# Altium PCB HARDWARE TASK_PCB.PcbDoc
Units mil, origin at the board's own origin, x right, y up, seen from the top; angles counter-clockwise.
Board outline 8165 x 5000 mil, 2 copper layers (Top Layer, Bottom Layer); 43 components, 51 nets, 262 pads, 62 vias.
Unrouted connection lines stored in the file: 4.
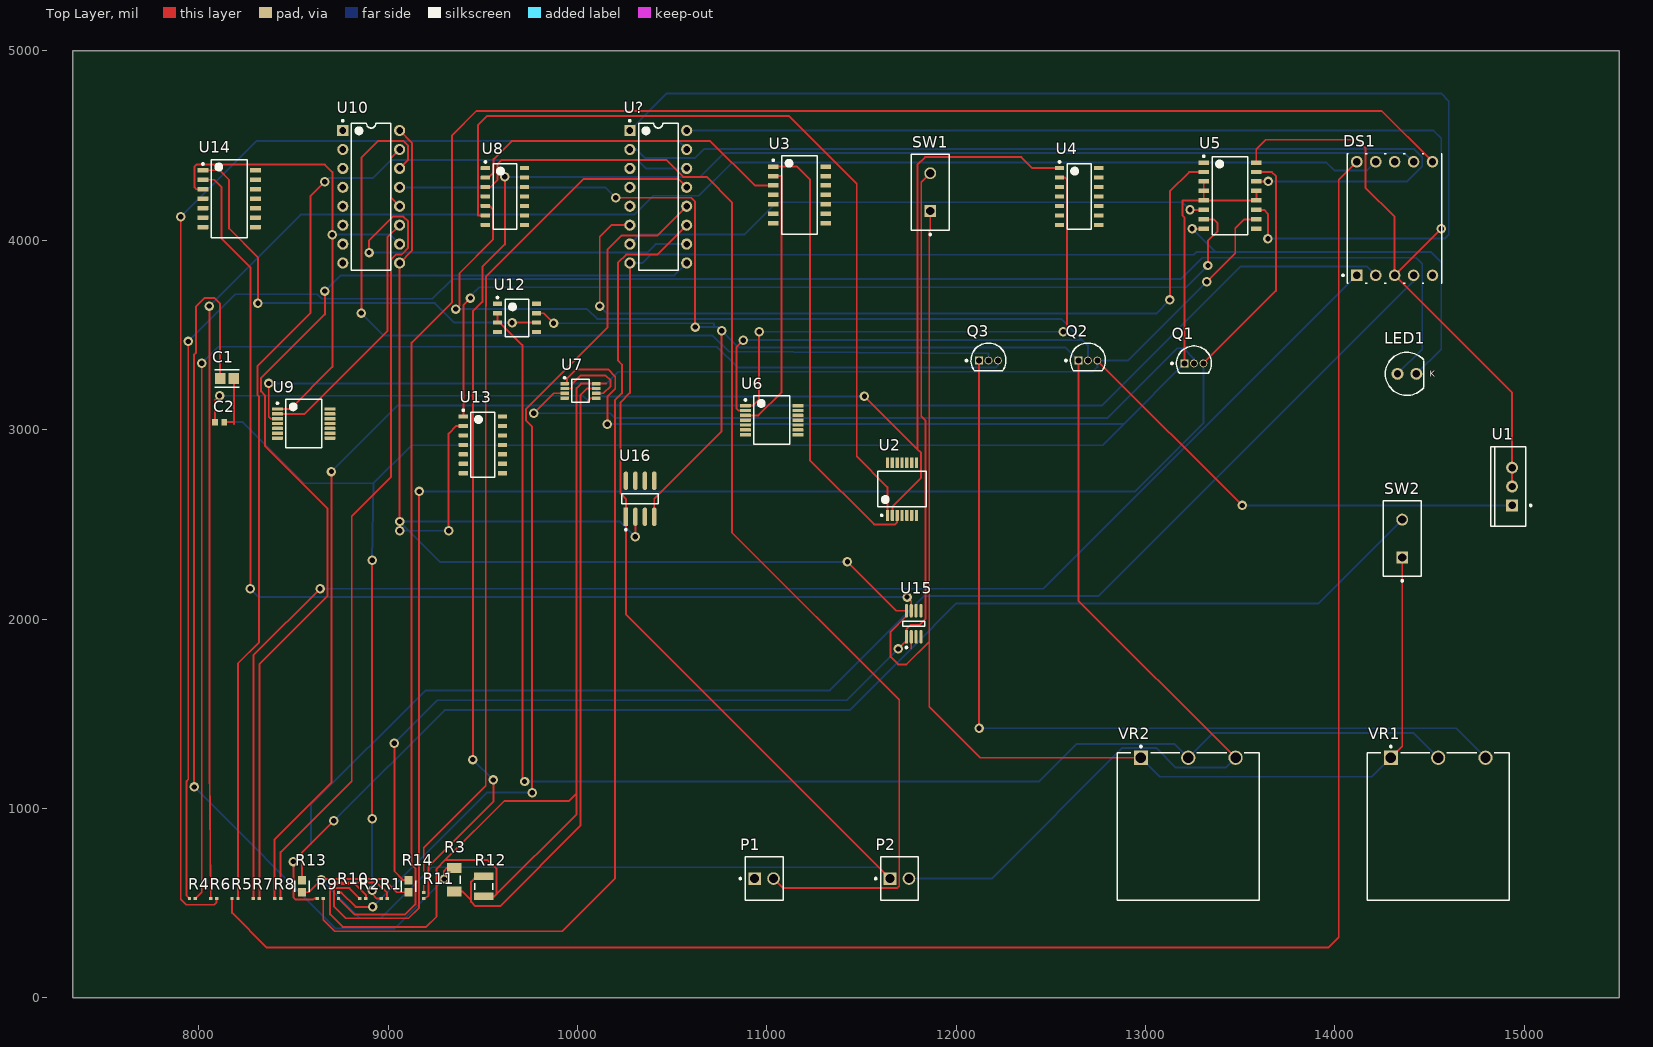
[diagram p0: Top Layer view]
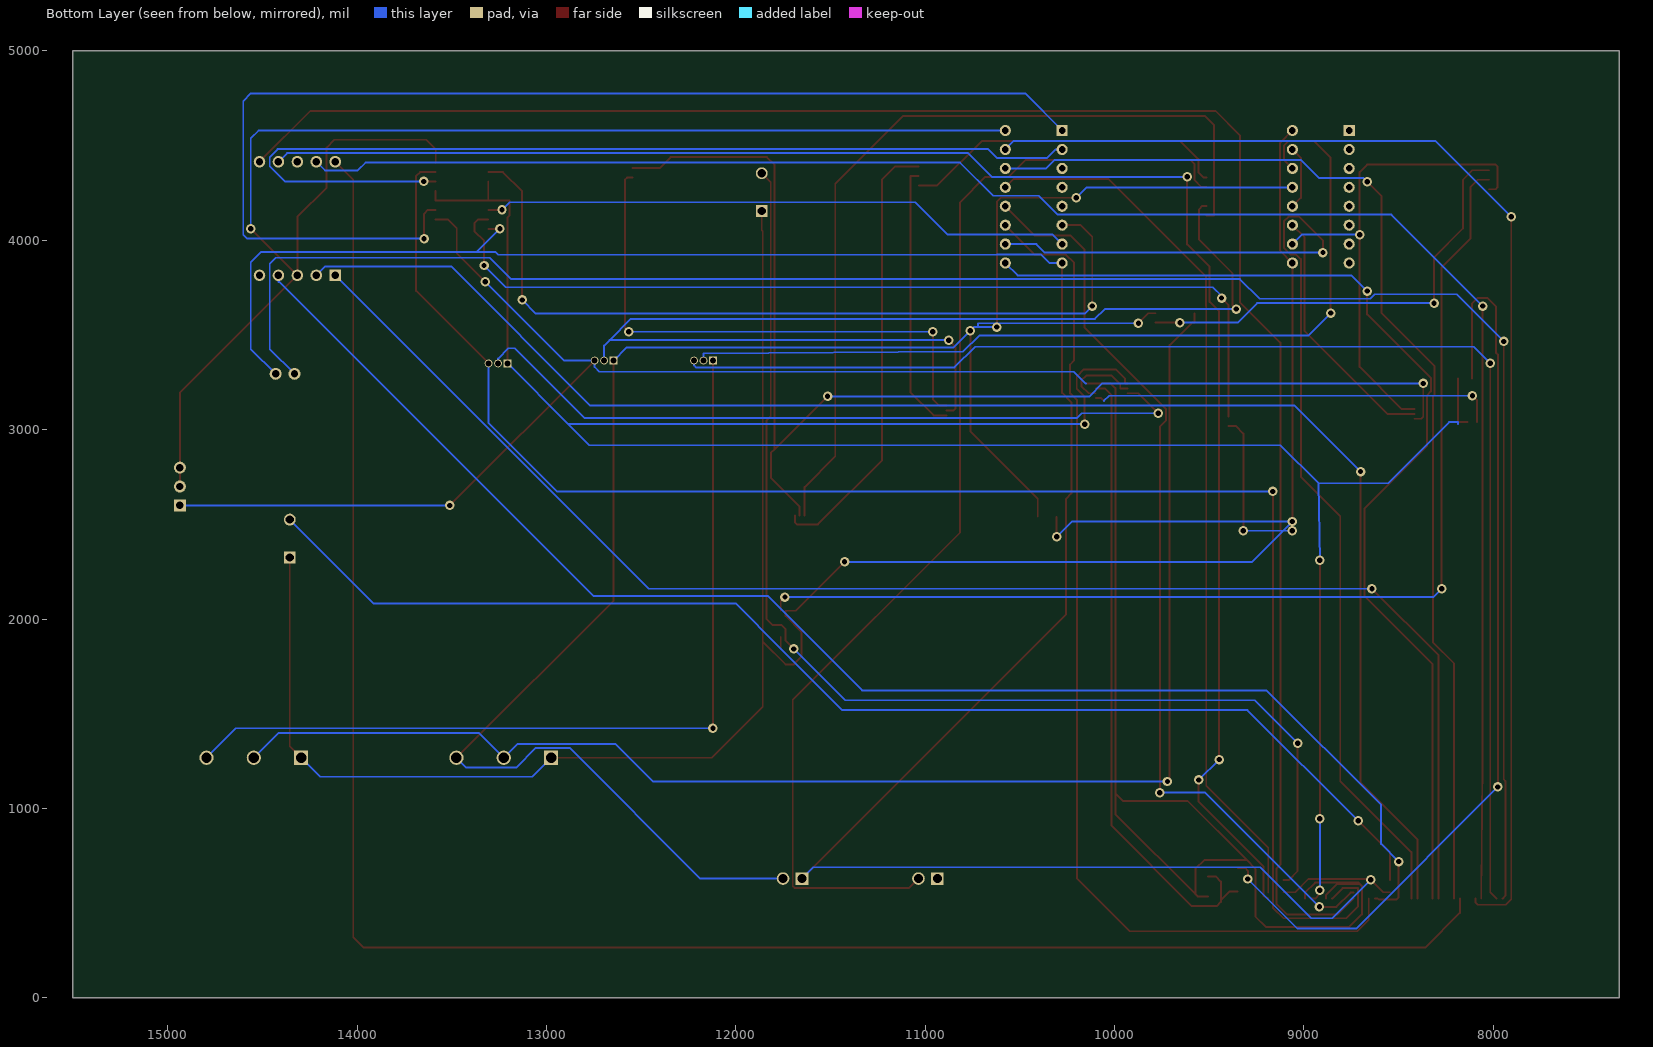
[diagram p1: Bottom Layer view, seen from below]

## Layer stack, top to bottom
Top Solder: solder mask 0.4, Solder Resist, Dk 3.5
Top Layer: signal copper 1.4
Dielectric 1: dielectric 12.6, FR-4, Dk 4.8
Bottom Layer: signal copper 1.4
Bottom Solder: solder mask 0.4, Solder Resist, Dk 3.5

## Board outline
7335,0 15500,0 15500,5000 7335,5000

## Design rules (kind name [scope] priority, off if disabled: settings)
Clearance [All] p1: gap=10 ignorepadtopadclearanceinfootprint=FALSE except(0: Arc-Hole Track-Hole SMDPad-Hole THPad-Hole Via-Hole Fill-Hole Poly-Hole Region-Hole Text-Hole)
PolygonConnect [All] p1: connectstyle=Relief reliefconductorwidth=10 reliefentries=4 polygonreliefangle="90 Angle" airgapwidth=10
RoutingVias [All] p1: holewidth=28 width=50 viastyle="Through Hole" minholewidth=28 minwidth=50 maxholewidth=28 maxwidth=50
SolderMaskExpansion [All] p1: expansion=4 istentingtop=FALSE
Width [All] p1: maxlimit=10 minlimit=10 preferedwidth=10
30 further rules are at their usual default settings.

## Components (designator, comment, footprint, x,y, rotation, side; value= is the part's Value field where it differs from the comment)
C1 "GRM21BR61E106KA73L" "CAP 10UF" 8148.53,3270 r0 top
C2 "GRM188R71H103KA01D" "CAP 10NF" 8109.61,3040 r0 top
DS1 "LSHD-5601" 7SEG 14315,4115 r0 top
LED1 "151051BS04000" "BLUE LED" 14380,3295 r0 top
P1 "22-27-2021" PIN 10985,629.21 r0 top
P2 "22-27-2021" PIN 11700,629.21 r0 top
Q1 "BC548B" "NPN TRANS" 13255,3350 r0 top
Q2 "BC548B" "NPN TRANS" 12695,3365 r0 top
Q3 "BC548B" "NPN TRANS" 12170,3365 r0 top
R1 "CRCW0402200RJNED" "200 OHM RES" 8978.37,523.96 r0 top
R2 "CRCW0402200RJNED" "200 OHM RES" 8865.86,523.96 r0 top
R3 "RN732BTTD6002B25" "60KOHM RES" 9348.45,623.43 r90 top
R4 "CRCW0402200RJNED" "200 OHM RES" 7965.75,523.96 r0 top
R5 "CRCW0402200RJNED" "200 OHM RES" 8190.78,523.96 r0 top
R6 "CRCW0402200RJNED" "200 OHM RES" 8078.26,523.96 r0 top
R7 "CRCW0402200RJNED" "200 OHM RES" 8303.29,523.96 r0 top
R8 "CRCW0402200RJNED" "200 OHM RES" 8415.8,523.96 r0 top
R9 "CRCW0402200RJNED" "200 OHM RES" 8640.83,523.96 r0 top
R10 "CRCW0402200RJNED" "200 OHM RES" 8737.6,539.71 r90 top
R11 "CRCW0402200RJNED" "200 OHM RES" 9187.65,539.71 r90 top
R12 "CRCW121010K0FKEAHP" "10KOHM RES" 9505,587.94 r90 top
R13 "CRCW0603330RFKEA" "330OHM RES" 8544.24,589.17 r90 top
R14 "CRCW0603330RFKEA" "330OHM RES" 9106.81,589.17 r90 top
SW1 "TS02CBE" "SPST SWITCH" 11862.44,4254.41 r90 top
SW2 "TS02CBE" "SPST SWITCH" 14355,2425 r90 top
U1 "LM340T-5.0" "5V REG" 14935,2700 r90 top
U2 "SN74LS08DBR" AND 11713.23,2686.22 r90 top
U3 "SN74LS32NSR" OR 11171.82,4239.65 r0 top
U4 "SN74LS04DR" "INVERTER NOT" 12648.46,4231.57 r0 top
U5 "CD4510BNSR" "BCD COUNTER" 13445.84,4235.81 r0 top
U6 "SN74LS08DBR" AND 11025,3050 r0 top
U7 "LM555CMM/NOPB" TIMER_1 10015,3205 r0 top
U8 "SN74LS74AD" "D FLIP FLOP" 9616.43,4231.57 r0 top
U9 "SN74LS08DBR" AND 8553.5,3032.28 r0 top
U10 "CD74HC4052E" DEMUX 8910,4230 r0 top
U12 "UA741CD" "OP AMP" 9680,3590 r0 top
U13 "SN74LS04DR" "INVERTER NOT" 9500,2920 r0 top
U14 "SN74LS32NSR" OR 8160,4220 r0 top
U15 "SN74LVC2G86DCTR" "XOR - duplicate" 11775,1975 r90 top
U16 "LD1117D33CTR" "3.3V REG" 10330,2635.12 r90 top
U? "SN7447AN" "7SEG DECODER" 10426.01,4230 r0 top
VR1 "3852A-282-103AL" POT 14545,1267.4 r0 top
VR2 "3852A-282-103AL" POT 13225,1267.4 r0 top

## Footprints (in the part's own frame and the unit in brackets; to place one, negate y for a bottom-side part, rotate by r counter-clockwise, add the part's x,y. Pads: shape width x height; smd on the part's side, far side on the other; paste and mask are expansions set on the pad)
"3.3V REG" [mil]
  rect 97.4x24.49 smd paste+0 mask+0: 1(-95.12,75)
  rrect100% 97.4x24.49 smd paste+0 mask+0: 2(-95.12,25) 3(-95.12,-25) 4(-95.12,-75) 5(95.12,-75) 6(95.12,-25) 7(95.12,25) 8(95.12,75)
  silkscreen extent -168,-96 27,96, body extent -164,-116 164,116, height 10
"5V REG" [mm] "FM, 3-Leads, Body 10.7x4.7mm, Pitch 2.54mm"
  rect 1.6x1.6 hole 1: 1(-2.54,0)
  round 1.6 hole 1: 2(0,0) 3(2.54,0)
  silkscreen extent -5.35,-2.63 5.35,2.85, body extent -5.4,-1.9 5.4,2.9, height 19.4
7SEG [mm]
  rect 1.55x1.55 hole 1 paste-1000 mask+0: 1(-5.08,-7.62)
  round 1.55 hole 1 paste-1000 mask+0: 2(-2.54,-7.62) 3(0,-7.62) 4(2.54,-7.62) 5(5.08,-7.62) 6(5.08,7.62) 7(2.54,7.62) 8(0,7.62) 9(-2.54,7.62) 10(-5.08,7.62)
  silkscreen extent -7.05,-8.68 6.33,8.68, body extent -6.43,-8.77 6.43,8.77, height 0.25
"7SEG DECODER" [mm] "DIP, 16-Leads, Body 19.7x6.6mm, Pitch 2.54mm"
  rect 1.5x1.5 hole 0.9: 1(-3.81,8.89)
  round 1.5 hole 0.9: 2(-3.81,6.35) 3(-3.81,3.81) 4(-3.81,1.27) 5(-3.81,-1.27) 6(-3.81,-3.81) 7(-3.81,-6.35) 8(-3.81,-8.89) 9(3.81,-8.89) 10(3.81,-6.35) 11(3.81,-3.81) 12(3.81,-1.27) 13(3.81,1.27) 14(3.81,3.81) 15(3.81,6.35) 16(3.81,8.89)
  silkscreen extent -3.93,-9.85 2.65,10.31, body extent -3.95,-9.85 3.95,9.85, height 5.08
"10KOHM RES" [mm] "Chip Resistor, 2-Leads, Body 3.20x2.50mm, IPC High Density"
  rect 1x2.6 smd: 1(-1.35,0) 2(1.35,0)
  silkscreen extent -0.45,-1.2 0.45,1.2, body extent -1.7,-1.35 1.7,1.35, height 0.6
"60KOHM RES" [mil]
  rect 53.36x75.05 smd paste+0 mask+0: 1(-62.03,0) 2(62.03,0)
  silkscreen extent -21,-31 21,31, body extent -108,-57 108,57, height 10
"200 OHM RES" [mm] "Chip Resistor, 2-Leads, Body 1.00x0.50mm, IPC High Density"
  rect 0.45x0.45 smd: 1(-0.4,0) 2(0.4,0)
  body extent -0.53,-0.27 0.53,0.28, height 0.4
"330OHM RES" [mil]
  rect 44.69x41.82 smd paste+0 mask+0: 1(-32.1,0) 2(32.1,0)
  silkscreen extent -30,-37 30,37, body extent -74,-41 74,41, height 10
AND [mm] "SOP, 14-Leads, Body 5.6x6.5mm, Pitch 0.65mm, IPC High Density"
  rrect22% 1.45x0.45 smd: 1(-3.525,1.95) 2(-3.525,1.3) 3(-3.525,0.65) 4(-3.525,0) 5(-3.525,-0.65) 6(-3.525,-1.3) 7(-3.525,-1.95) 8(3.525,-1.95) 9(3.525,-1.3) 10(3.525,-0.65) 11(3.525,0) 12(3.525,0.65) 13(3.525,1.3) 14(3.525,1.95)
  silkscreen extent -3.65,-3.25 2.4,3.25, body extent -3.91,-3.1 3.91,3.1, height 2
"BCD COUNTER" [mm] "SOIC,16-Leads,Body 10.5x5.6mm,Pitch 1.27mm,IPC High Density"
  rrect17% 1.45x0.6 smd: 1(-3.525,4.445) 2(-3.525,3.175) 3(-3.525,1.905) 4(-3.525,0.635) 5(-3.525,-0.635) 6(-3.525,-1.905) 7(-3.525,-3.175) 8(-3.525,-4.445) 9(3.525,-4.445) 10(3.525,-3.175) 11(3.525,-1.905) 12(3.525,-0.635) 13(3.525,0.635) 14(3.525,1.905) 15(3.525,3.175) 16(3.525,4.445)
  silkscreen extent -3.65,-5.25 2.4,5.42, body extent -2.8,-5.25 2.8,5.25, height 2
"BLUE LED" [mm] "THT, LED-5mm, 2pin- Body 5.8mm"
  round 1.6 hole 1: 1(1.27,0) 2(-1.27,0)
  silkscreen extent -2.9,-2.9 2.29,2.9, body extent -2.9,-2.9 2.5,2.9, height 11.7
"CAP 10NF" [mm]
  rect 0.75x0.85 smd: 1(-0.625,0) 2(0.625,0)
  body extent -0.85,-0.45 0.85,0.45, height 0.9
"CAP 10UF" [mil]
  rect 55.34x59.38 smd paste+0 mask+0: 1(-36.47,0) 2(36.47,0)
  silkscreen extent -64,-45 64,45, body extent -84,-49 84,49, height 10
"D FLIP FLOP" [mm] "SOIC, 14-Leads, Body 8.75x4mm, Pitch 1.27mm, IPC High Density"
  rrect18% 1.25x0.55 smd: 1(-2.625,3.81) 2(-2.625,2.54) 3(-2.625,1.27) 4(-2.625,0) 5(-2.625,-1.27) 6(-2.625,-2.54) 7(-2.625,-3.81) 8(2.625,-3.81) 9(2.625,-2.54) 10(2.625,-1.27) 11(2.625,0) 12(2.625,1.27) 13(2.625,2.54) 14(2.625,3.81)
  silkscreen extent -2.75,-4.38 1.6,4.76, body extent -3.02,-4.32 3.02,4.32, height 1.59
DEMUX [mm] "DIP, 16-Leads, Body 19.7x6.6mm, Pitch 2.54mm"
  rect 1.5x1.5 hole 0.9: 1(-3.81,8.89)
  round 1.5 hole 0.9: 2(-3.81,6.35) 3(-3.81,3.81) 4(-3.81,1.27) 5(-3.81,-1.27) 6(-3.81,-3.81) 7(-3.81,-6.35) 8(-3.81,-8.89) 9(3.81,-8.89) 10(3.81,-6.35) 11(3.81,-3.81) 12(3.81,-1.27) 13(3.81,1.27) 14(3.81,3.81) 15(3.81,6.35) 16(3.81,8.89)
  silkscreen extent -3.93,-9.85 2.65,10.31, body extent -3.95,-9.85 3.95,9.85, height 5.08
"INVERTER NOT" [mm] "SOIC, 14-Leads, Body 8.75x4mm, Pitch 1.27mm, IPC High Density"
  rrect18% 1.25x0.55 smd: 1(-2.625,3.81) 2(-2.625,2.54) 3(-2.625,1.27) 4(-2.625,0) 5(-2.625,-1.27) 6(-2.625,-2.54) 7(-2.625,-3.81) 8(2.625,-3.81) 9(2.625,-2.54) 10(2.625,-1.27) 11(2.625,0) 12(2.625,1.27) 13(2.625,2.54) 14(2.625,3.81)
  silkscreen extent -2.75,-4.38 1.6,4.76, body extent -3.02,-4.32 3.02,4.32, height 1.59
"NPN TRANS" [mm] "TO, 3-Leads, Body Dia 4.7mm, Pitch 1.27mm"
  rect 1.05x1.05 hole 0.8: 1(-1.27,0)
  round 1.05 hole 0.8: 2(0,0) 3(1.27,0)
  silkscreen extent -3.07,-1.34 2.35,2.35, body extent -2.35,-1.33 2.36,2.36, height 7.87
"OP AMP" [mm] "SOIC, 8-Leads, Body 5x4mm, Pitch 1.27mm, IPC High Density"
  rrect18% 1.25x0.55 smd: 1(-2.625,1.905) 2(-2.625,0.635) 3(-2.625,-0.635) 4(-2.625,-1.905) 5(2.625,-1.905) 6(2.625,-0.635) 7(2.625,0.635) 8(2.625,1.905)
  silkscreen extent -2.75,-2.5 1.6,2.85, body extent -3,-2.45 3,2.45, height 1.63
OR [mm] "SOP, 14-Leads, Body 10.2x5.3mm, Pitch 1.27mm, IPC High Density"
  rrect17% 1.45x0.6 smd: 1(-3.525,3.81) 2(-3.525,2.54) 3(-3.525,1.27) 4(-3.525,0) 5(-3.525,-1.27) 6(-3.525,-2.54) 7(-3.525,-3.81) 8(3.525,-3.81) 9(3.525,-2.54) 10(3.525,-1.27) 11(3.525,0) 12(3.525,1.27) 13(3.525,2.54) 14(3.525,3.81)
  silkscreen extent -3.65,-5.25 2.4,5.25, body extent -2.8,-5.25 2.8,5.25, height 2
PIN [mm] "Header, 2-Leads, Body 5.8x5.08mm"
  rect 1.7x1.7 hole 1.19: 1(-1.27,0)
  round 1.7 hole 1.19: 2(1.27,0)
  silkscreen extent -3.31,-2.9 2.54,2.9, body extent -2.54,-2.9 2.54,2.9, height 11.72
POT [mm] "TH, 3-Leads, Body 19.81x19.05mm, Pitch 6.35mm"
  rect 1.9x1.9 hole 1.4: 1(-6.35,0)
  round 1.9 hole 1.4: 2(0,0) 3(6.35,0)
  silkscreen extent -9.53,-19.11 9.53,1.62, body extent -9.52,-19.11 9.52,0.7, height 19.05
"SPST SWITCH" [mm] "THD, 2-Leads, Body 10.16x5.08mm"
  rect 1.6x1.6 hole 1.09: 1(-2.54,0)
  round 1.6 hole 1.09: 3(2.54,0)
  silkscreen extent -5.8,-2.54 5.08,2.54, body extent -5.08,-2.54 5.08,2.54, height 12.93
TIMER_1 [mm] "TSOP, 8-Leads, Body 3.1x3.1mm, Pitch 0.65mm, IPC High Density"
  rrect22% 1.15x0.45 smd: 1(-2.125,0.975) 2(-2.125,0.325) 3(-2.125,-0.325) 4(-2.125,-0.975) 5(2.125,-0.975) 6(2.125,-0.325) 7(2.125,0.325) 8(2.125,0.975)
  silkscreen extent -2.25,-1.55 1.15,1.87, body extent -2.45,-1.5 2.45,1.5, height 0.94
"XOR - duplicate" [mm]
  rect 1.854x0.416 smd paste+0 mask+0: 1(-1.75,0.975)
  rrect100% 1.854x0.416 smd paste+0 mask+0: 2(-1.75,0.325) 3(-1.75,-0.325) 4(-1.75,-0.975) 5(1.75,-0.975) 6(1.75,-0.325) 7(1.75,0.325) 8(1.75,0.975)
  silkscreen extent -3.3,-1.47 0.32,1.47

## Part data
C1: library part "CAP 10UF", "Chip Multilayer Ceramic Capacitors for General Purpose, 0805, 10uF, X5R, 15%, 10%, 25V", Capacitance=10uF, Case Code (Imperial)=0805, Case Code (Metric)=2012, Dielectric=X5R, Max Operating Temperature=85°C, Min Operating Temperature=-55°C, Package Quantity=1, Tolerance=10%, Voltage=25V, Case/Package=0805, Depth=1.25mm, Height=1.25mm, Lead Free="Lead Free", Length=2mm, Material=Ceramic, Mount="Surface Mount", Packaging="Tape and Reel", Radiation Hardening=No, Termination=SMD/SMT, Thickness=0.053inch, Voltage Rating=25V, Voltage Rating (DC)=25V, Width=0.049inch
C2: library part "CAP 10NF", "Chip Capacitor, 10 nF, +/- 10%, 50 V, -55 to 125 degC, 0603 (1608 Metric), RoHS, Tape and Reel", Capacitance=10nF, Case Code (Imperial)=0603, Case Code (Metric)=1608, Dielectric=X7R, Dielectric Material=Ceramic, Insulation Resistance=10GR, Manufacturer=Murata, Max Operating Temperature=125degC, Min Operating Temperature=-55degC, Package Description="2-Pin Surface Mount Device, Body 1.6 x 0.8 mm", Package Quantity=1, Tolerance=10%, Voltage=50V, Case/Package=0603, Datasheet URL=http://search.murata.co.jp/Ceramy/image/img/A01X/G101/ENG/GRM188R71H103KA01-01.pdf, Datasheet Version=42401.0, Depth=0.8mm, Height=0.8mm, Lead Free=LeadFree, Length=1.6mm, Manufacturer URL=http://www.murata.com/, Material=Ceramic, Mount=SurfaceMount, Number of Pins=2, Package Reference=0603, Packaging=TapeandReel, REACH SVHC=Unknown, RoHSCompliant=True, Termination=SMD/SMT, Thickness=0.035inch, Voltage Rating=50V, Voltage Rating (DC)=50V, Width=0.031inch
DS1: library part 7SEG, "LED 7-SEG .56\" GREEN 565NM CA", Forward Current=20mA, Forward Voltage=2.1V, Manufacturer=Lite-On, Reverse Voltage=5V, Temperature="-35°C to +105°C", Temperature Range High=+105°C, Temperature Range Low=-35°C, Automotive=No, Category=Disp, ComponentLink2Description=Datasheet, ComponentLink2URL=https://media.digikey.com/pdf/Data%20Sheets/Lite-On%20PDFs/LSHD-5601.pdf, Device Class L1=Optoelectronics, Device Class L2=Displays, Device Class L3="LED Displays", Digikey Description="LED 7-SEG .56\" GREEN 565NM CA", Display Type=LED, Element Config="Common Anode", Height=8.25mm, Lead Free=Yes, Luminous Intensity=2.4mcd, Manufacturer Part Number=LSHD-5601, Mouser Description="LED Displays & Accessories Green, Low Current 0.56, CARHD", Octopart=https://octopart.com/lshd-5601-lite-on-548440, Package=LSHD-5601, RoHS=TRUE, Test Current=20mA, Wavelength=569nm
LED1: library part "BLUE LED", "THT LED round mono-color color lens, WL-TMRW, Blue", Emitting color=Blue, Manufacturer="Wuerth Elektronik", ComponentLink1Description="Manufacturer URL", ComponentLink1URL=http://www.we-online.com, ComponentLink2Description=Datasheet, ComponentLink2URL=http://katalog.we-online.de/pbs/datasheet/7448042001.pdfhttp://katalog.we-online.de/pbs/datasheet/7448042001.pdfhttp://katalog.we-online.de/pbs/datasheet/7448042001.pdfhttp://katalog.we-online.de/pbs/datasheet/151051BS04000.pdf, PackageReference="Type 5mm", PartNumber=151051BS04000
P1 P2: library part PIN, "Male Header, Pitch 2.54 mm, 1 x 2 Position, Height 11.7 mm, Tail Length 3.56 mm, 0 to 75 degC, RoHS, Bulk", Current - Max=4A, Manufacturer=Molex, Operating temperature=0°Cto+75°C, Package Description="2-Leads Header, Body 5.08 x 5.8 mm, Pitch 2.54 mm", Package Version="Rev. BC, 02/2012", PartNumber=0022272021, Voltage - Max=250V, Contact material=Tinplatedbrass, Current rating=4A, Datasheet URL=http://www.molex.com/pdm_docs/sd/022272021_sd.pdf, Datasheet Version="Rev. F, 06/2009", Housing material=Nylon(UL94V-0), Manufacturer URL=http://www.molex.com/, Mounting Technology=ThroughHole, No. of Positions=2, No. of Rows=1, Orientation=Vertical, Package Reference=22-27-2021, Pitch=2.54mm, Voltage Rating=250V
Q1 Q2 Q3: library part "NPN TRANSISTOR", "Amplifier Transistor, NPN Silicon, 3-Pin TO-92, Bulk Box", Manufacturer="On Semiconductor", ComponentLink1Description="Manufacturer URL", ComponentLink1URL=http://www.onsemi.com/, ComponentLink2Description=Datasheet, ComponentLink2URL=http://www.onsemi.com/pub_link/Collateral/BC546-D.PDF, ComponentLink3Description="Package Specification", ComponentLink3URL=http://www.onsemi.cn/pub_link/Collateral/2N6426-D.PDF, DatasheetVersion="Rev. 7", fT Min (MHz)=150, IC Continuous (A)=0.1, Mounting Technology="Through Hole", PackageDescription="3-Pin Transistor Outline, Body 4.825 x 3.685 mm, Pitch 1.27 mm", PackageReference=TO-92-3-29-11_AM_SL, PackageVersion="Rev. AM", Packing="Bulk Box", PartNumber=BC548B, Polarity=NPN, RoHS=FALSE
R1 R2 R4 R5 R6 R7 R8 R9 R10 R11: library part "200OHM RES", Manufacturer="Vishay Dale", Part Number=CRCW0402200RJNED
R3: library part "60KOHM RES", "60kΩ ±0.1% 0.125W, 1/8W Chip Resistor 1206 (3216 Metric) Moisture Resistant Thin Film", Case Code (Imperial)=1206, Case Code (Metric)=3216, Max Operating Temperature=125°C, Min Operating Temperature=-55°C, Power Rating=125mW, Resistance=60kR, Temperature Coefficient=25ppm/°C, Tolerance=0.1%, Voltage Rating=150V, Case/Package=1206, Composition="Thin Film", Height=0.6mm, Length=3.2mm, Packaging="Tape and Reel", Termination=SMD/SMT, Weight=0.000571oz, Width=1.6mm
R12: library part "10KOHM RES", Manufacturer="Vishay Dale", Part Number=CRCW121010K0FKEAHP
R13 R14: library part "33OHM RES", "RES Thick Film, 330Ω, 1%, 0.1W, 100ppm/°C, 0603", Case Code (Imperial)=0603, Case Code (Metric)=1608, Max Operating Temperature=155°C, Max Power Dissipation=100mW, Min Operating Temperature=-55°C, Package Quantity=10, Resistance=330R, Temperature Coefficient=100ppm/°C, Tolerance=1%, Voltage Rating=75V, Case/Package=0603, Composition="Thick Film", Contact Plating=Tin, Depth=0.85mm, Features="Automotive AEC-Q200", Height=0.45mm, Lead Free="Lead Free", Length=1.55mm, Military Standard=Not, Mount="Surface Mount", Number of Terminations=2, Packaging="Tape and Reel", Power Rating=100mW, Radiation Hardening=No, Termination=SMD/SMT, Voltage Rating (DC)=75V, Weight=7.1E-05oz, Width=0.033inch
SW1 SW2: library part "SPST SWITCH", "Tiny Slide Switch, SPST, 20 V, -30 to 85 degC, 2-Pin THD, RoHS, Bulk", AC Voltage Rating (Max)=20V, Manufacturer="C&K Components", Operating Temp Range=-30Cto85C, Package Description="2-Pin Through Hole Device, Body 10.16 x 5.08 mm", Actuator Material=Nylon, Actuator Style=TopSlide, Contact material=CopperAlloy, Contact Plating=Gold/Nickel, Datasheet URL=http://www.ck-components.com/media/1426/ts_12feb16.pdf, Datasheet Version=02/2016, DC Voltage Rating (Max)=20V, Housing material=N/A/StainlessSteel, Manufacturer URL=http://www.ckswitches.com/, Mounting Style=ThroughHole, Mounting Technology=ThroughHole, Package Reference=TS02CBE, Pole Throw Configuration=SPST, Product Depth (mm)=5.08mm, Product Height (mm)=12.91mm, Product Length (mm)=10.16mm, Switch Configuration=OFFNoneON, Terminal Type=PCPins, Type=Tiny
U1: library part "5V REG", "Series 3-Terminal Positive Regulators, 3-pin TO-220", Manufacturer="Texas Instruments", PackageTopMarking="NSUZXYTTE#*LM340T5*7805 P+", PowerWise=N, ComponentLink1Description="Datasheet URL", ComponentLink1URL=http://www.ti.com/general/docs/lit/getliterature.tsp?genericPartNumber=LM340-N&fileType=pdf, CompType="LDO IC", PackageDescription="TO-220, Molded, 3 Lead, Straight", PackageReference=NDE0003A, PinCount=3, RoHS=N
U2 U6 U9: library part AND, "Quadruple 2-Input Positive-AND Gates, DB0014A, LARGE T&R", F @ Nom Voltage(Max)(Mhz)=35, Generic Part Number=SN74LS08, ICC @ Nom Voltage(Max)(mA)=0.021, Manufacturer="Texas Instruments", Operating Temperature Range(C)="0 to 70", Rating=Catalog, tpd @ Nom Voltage(Max)(ns)=25, Voltage(Nom)(V)=5, Bits(#)=4, DatasheetVersion=SDLS033, Input Type=TTL, Output Drive (IOL/IOH)(Max)(mA)=-0.8/16, Output Type=TTL, PackageReference=DB0014A, Schmitt Trigger=No, Technology Family=LS, VCC(Max)(V)=5.25, VCC(Min)(V)=4.75
U3 U14: library part OR, "Quad 2-input positive-OR gates, NS0014A, LARGE T&R", F @ Nom Voltage(Max)(Mhz)=35, Generic Part Number=SN74LS32, ICC @ Nom Voltage(Max)(mA)=0.038, Manufacturer="Texas Instruments", Operating Temperature Range(C)="0 to 70", Rating=Catalog, tpd @ Nom Voltage(Max)(ns)=22, Voltage(Nom)(V)=5, Bits(#)=4, DatasheetVersion=SDLS100, Input Type=TTL, Output Drive (IOL/IOH)(Max)(mA)=0.8/-16, Output Type=TTL, PackageReference=NS0014A, PackageVersion=http://www.ti.com/lit/ml/msop002a/msop002a.pdf, VCC(Max)(V)=5.25, VCC(Min)(V)=4.75
U4 U13: library part NOT, "Hex inverters, D0014A, LARGE T&R", F @ Nom Voltage(Max)(Mhz)=35, Generic Part Number=SN74LS04, ICC @ Nom Voltage(Max)(mA)=0.033, Manufacturer="Texas Instruments", Operating Temperature Range(C)="0 to 70", Rating=Catalog, tpd @ Nom Voltage(Max)(ns)=22, Voltage(Nom)(V)=5, Bits(#)=6, Code_JEDEC=MS-012, DatasheetVersion=SDLS029C, Input Type=TTL, Output Drive (IOL/IOH)(Max)(mA)=-0.4/8, Output Type=CMOS, PackageReference=D0014A, Schmitt Trigger=No, Technology Family=LS, VCC(Max)(V)=5.25, VCC(Min)(V)=4.75
U5: library part "BCD COUNTER", "CMOS Presettable BCD Up/Down Counter, NS0016A, LARGE T&R", F @ Nom Voltage(Max)(Mhz)=8, Generic Part Number=CD4510B, ICC @ Nom Voltage(Max)(mA)=0.03, Manufacturer="Texas Instruments", Operating Temperature Range(C)="-55 to 125", Rating=Catalog, tpd @ Nom Voltage(Max)(ns)=200, Voltage(Nom)(V)=5,10,15, Bits(#)=4, DatasheetVersion=SCHS071B, Function=Counter, Input Type=CMOS, Inputs=1, Output Drive (IOL/IOH)(Max)(mA)=1.5/-1.5, Output Type=CMOS, PackageReference=NS0016A, Schmitt Trigger=No, Technology Family=CD4000, Type=Other, VCC(Max)(V)=18, VCC(Min)(V)=3
U7: library part TIMER_1, "Timer, 8-pin Mini SOIC, Pb-Free", Manufacturer="Texas Instruments", PackageTopMarking=ZXTT*Z55, PowerWise=N, Code_JEDEC=MO-187-AA, ComponentLink1Description="Datasheet URL", ComponentLink1URL=http://www.ti.com/general/docs/lit/getliterature.tsp?genericPartNumber=LM555&fileType=pdf, CompType="Analog IC", PackageDescription="MINI SOIC, .118 x .118 x .034in, 8 Lead, .0256in Pitch", PackageReference=DGK0008A, PinCount=8, RoHS=Y
U8: library part "D FLIP FLOP", "Dual D-type pos.-edge-triggered flip-flops with preset and clear, D0014A, TUBE", F @ Nom Voltage(Max)(Mhz)=35, Generic Part Number=SN74LS74A, ICC @ Nom Voltage(Max)(mA)=8, Manufacturer="Texas Instruments", Operating Temperature Range(C)="0 to 70", Rating=Catalog, tpd @ Nom Voltage(Max)(ns)=40, Voltage(Nom)(V)=5, 3-State Output=No, Bits(#)=2, Code_JEDEC=MS-012, DatasheetVersion=SDLS119, Input Type=TTL, Output=3S, Output Drive (IOL/IOH)(Max)(mA)=8/-0.4, Output Logic=Inverted,Non-inverted, Output Type=TTL, PackageReference=D0014A, Schmitt Trigger=No, Technology Family=LS, VCC(Max)(V)=5.25, VCC(Min)(V)=4.75
U10: library part DEMUX, "High Speed CMOS Differential 4-Channel Analog Multiplexer/Demultiplexer, N0016A, TUBE", Generic Part Number=CD74HC4052, Manufacturer="Texas Instruments", Operating Temperature Range(C)="-55 to 125", Rating=Catalog, Bandwidth(Max)(MHz)=185, Code_JEDEC=MS-001, Configuration="2 X 1：4 MUX", Crosstalk=Yes, DatasheetVersion=SCHS122J, Output Type=CMOS, PackageReference=N0016A, PackageVersion=http://www.ti.com/lit/ml/mpdi002c/mpdi002c.pdf, Ron(Max)(Ohms)=130, Ron(Typ)(Ohms)=45, VCC(Max)(V)=6, VCC(Min)(V)=2
U12: library part "OP AMP", "General-Purpose Operational Amplifier, 7 to 36 V, 0 to 70 degC, 8-pin SOIC (D8), Green (RoHS & no Sb/Br)", Manufacturer="Texas Instruments", Total Supply Voltage(Max)(+5V is 5, +/-5V is 10)=36, Total Supply Voltage(Min)(+5V is 5, +/-5V is 10)=7, CMRR(Min)(dB)=70, Code_JEDEC=MS-012, ComponentLink1Description="Manufacturer URL", ComponentLink1URL=http://www.ti.com/, ComponentLink2Description=Datasheet, ComponentLink2URL=http://www.ti.com/lit/ds/symlink/ua741.pdf, ComponentLink3Description="Package Specification", ComponentLink3URL=http://www.ti.com/litv/pdf/msoi002j, DatasheetVersion=SLOS094B, Eco-Plan="Green (RoHS & no Sb/Br)", GBW(Typ)(MHz)=1, IIB(Max)(pA)=800000, Iq per channel(Max)(mA)=2.8, Mounting Technology="Surface Mount", Number of Channels=1, PackageDescription="8-Pin Plastic Small Outline, Body 4.9 x 3.9 mm, Pitch 1.27 mm", PackageReference=D0008A, PackageVersion="4040047-3/M, 06/2011", PartNumber=UA741CD, Slew Rate(Typ)(V/us)=0.5, Sub Family="General Purpose Amplifier, High Supply Voltage Amplifier (>=30V)", Vio (25C)(Max)(mV)=6
U15: library part XOR_1, "IC GATE XOR 2CH 2-INP SM8", Case/Package=SSOP, High Level Output Current=-32mA, Low Level Output Current=32mA, Max Operating Temperature=125°C, Max Supply Voltage=5.5V, Min Operating Temperature=-40°C, Min Supply Voltage=1.65V, Package Quantity=1, Quiescent Current=10uA, Contact Plating=Gold, Height=1.29mm, Lead Free="Lead Free", Length=2.95mm, Logic Function="XOR GATE", Mount="Surface Mount", Number of Bits=2, Number of Circuits=2, Number of Elements=2, Number of Gates=2, Number of Input Lines=2, Number of Inputs=2, Number of Output Lines=1, Number of Outputs=1, Number of Pins=8, Output Current=32mA, Packaging="Tape and Reel", Propagation Delay=3.6ns, Radiation Hardening=No, REACH SVHC="No SVHC", RoHS Compliant=Yes, Schmitt Trigger Input=No, Series=74LVC, Technology=CMOS, Turn-On Delay Time=3.6ns, Weight=0.000825oz, Width=2.8mm
U16: library part "3.3V REG", "IC REG LINEAR 3.3V 800MA 8SO", Case/Package=SO, Dropout Voltage=1.1V, Input Bias Current=5mA, Max Input Voltage=15V, Max Operating Temperature=125°C, Max Output Current=1.3A, Max Power Dissipation=12W, Min Operating Temperature=-40°C, Min Output Voltage=3.3V, Output Voltage Accuracy=1%, Package Quantity=1, Quiescent Current=10mA, Accuracy=1%, Height=1.65mm, Lead Free="Lead Free", Length=5mm, Mount="Surface Mount", Number of Outputs=1, Number of Pins=8, Number of Regulators=1, Output Current=1.3A, Output Type=Fixed, Output Voltage=3.3V, Packaging="Tape and Reel", Polarity=Positive, Power Dissipation=12W, Radiation Hardening=No, Width=4mm
U?: library part "7SEG DEC", "BCD-to-7-Segment Decoder / Driver, 4.75 to 5.25 V, 0 to 70 degC, 16-pin DIP (N16), Pb-Free (RoHS)", Manufacturer="Texas Instruments", Code_JEDEC=MS-001, ComponentLink1Description="Manufacturer URL", ComponentLink1URL=http://www.ti.com/, ComponentLink2Description=Datasheet, ComponentLink2URL=http://www.ti.com/general/docs/lit/getliterature.tsp?genericPartNumber=SN7447A&fileType=pdf, ComponentLink3Description="Package Specification", ComponentLink3URL=http://www.ti.com/litv/pdf/mpdi002c, DatasheetVersion=SDLS111, Eco-Plan="Pb-Free (RoHS)", Mounting Technology="Through Hole", PackageDescription="16-Pin Plastic In-Line, Body 19.305 x 6.35 mm, Pitch 2.54 mm", PackageReference=N0016A, PackageVersion=4040049/E, PartNumber=SN7447AN, SubFamily="Discrete Segment LED Driver", Vin(Max)(V)=5.25, Vin(Min)(V)=4.75
VR1 VR2: library part POT, "Diameter Panel Control, 10 KOhm, +/- 10%, 2 W, -1 to 125 degC, 3-Pin THD, RoHS, Bulk", Manufacturer=Bourns, Power (Watts)=2W, Resistance (Ohms)=10k, Resistive Material=Cermet, Standard Package=45, Temperature Coefficient=±150ppm/degC, Tolerance=±10%, Actuator Diameter="0.250\"(6.35mm)", Actuator Length="0.875\"(22.23mm)", Actuator Type=Slotted, Associated Product="36-8560-ND / -KNOBINSTRUMW/DIALRND.9\"DIA / 36-8555-ND / -KNOBINSTRUMSKIRTEDRND.7\"DIA / 36-8556-ND / -KNOBINSTRUMSKIRTEDRND.9\"DIA / 36-8565-ND / -KNOBINSTRUMDBLBARRND.7\"DIA / 36-8566-ND / -KNOBINSTRUMDBLBARRND.9\"DIA / 36-8568-ND / -KNOBINSTRUMSGLBARRND.7\"DIA / 36-8569-ND / -KNOBINSTRUMSGLBARRND.9\"DIA / 36-8559-ND / -KNOBINSTRUMW/DIALRND.7\"DIA / 226-1006-ND / -KNOBBLKGLOSS.75\"DIA.250\"SHAFT / 226-1007-ND / -KNOBBLKGLOSS.925\"DIA.250\"SHAFT / 226-1011-ND / -KNOBBLKGLOS", Built in Switch=None, Bushing Thread=3/8-32, Catalog Drawings="3852SeriesSide1 /  / 3852SeriesSide2", Category=Potentiometers,VariableResistors, Datasheet URL=https://datasheet.ciiva.com/11831/0900766b80f93b4b-11831016.pdf, Datasheet Version=Sep-14, Family=RotaryPotentiometers,Rheostats, Manufacturer URL=http://www.bourns.com/, Mounting Type=PanelMount, Number of Gangs=1, Number of Turns=1, Online Catalog=3852and3856Series, Other Names=3852A282103AL, Packaging=Bulk, PCN Design/Specification=PBTResinJun/2011, PCN Other=MultipleChanges01/Dec/2012, RoHS Information=3852A-LMaterialDeclaration, Rotation=280deg, Series=3852, Taper=Linear, Termination Style=SolderLug

## Via types
v1: diameter 50, hole 28, Top Layer to Bottom Layer, 62 vias

## Nets (pads, with @x,y where several pads share a name; then routed paths per layer and width w, separated by ;. In a path a pad name is that pad's centre, name@x,y a point inside that pad or via, vN(x,y) a via of type N, cw(c..) or ccw(c..) an arc to the next point about the centre after c; other vN are vias at no path point)
GND: C1.2 C2.2 Q1.1 R1.1 U5.3 U5.4 U5.5 U5.12 U5.13 U7.1 | length 12673.5
  Top Layer w10: C2.2 8185,3040 ; 8185,3030 8185,3040 ; C1.2 8185,3040 ; v1(8915,567) 8915,549 8940.04,523.96 R1.1 ; v1(8915,945) v1(8915,2310) ; U7.1 9945,3243.39 9945,3271 9992,3318 10161,3318 10199,3280 10199,3215.23 10157,3173.23 v1(10157,3029) ; Q1.1 13205,4122.14 13194.14,4133 13194.14,4209.11 13195.84,4210.81 U5.5 ; U5.3 U5.4 U5.5 ; U5.13 U5.12 U5.5
  Bottom Layer w10: 8185,3030 8185,3040 8232,3040 8555,2717 8922,2717 ; v1(8915,567) v1(8915,945) ; v1(8915,2310) 8922,2717 ; v1(10157,3029) 12884,3029 ; Q1.1 12884,3029 ; 8922,2717 9123,2918 12773,2918 12884,3029
NetC1_1: C1.1 R3.2 | length 4935.9
  Top Layer w10: v1(7975,1113) 7975,3396 7984,3405 7984,3649 8030.93,3695.93 8080,3695.93 8112.07,3663.86 C1.1 ; v1(9295,627) 9295,670.46 9310,685.46 R3.2
  Bottom Layer w10: v1(7975,1113) 8723,365 9033,365 v1(9295,627)
NetC2_1: C2.1 U7.5 | length 2156.2
  Top Layer w10: C2.1 8085,3155 v1(8109,3179) ; 10055,3151.61 10070,3166.61 U7.5
  Bottom Layer w10: v1(8109,3179) 10027.61,3179 10055,3151.61
NetDS1_1: DS1.1 R7.1 | length 7942.6
  Top Layer w10: R7.1 8287.54,1807.54 v1(8640,2160)
  Bottom Layer w10: v1(8640,2160) 12460,2160 DS1.1
NetDS1_2: DS1.2 R8.1 | length 8362.3
  Top Layer w10: R8.1 8400.05,836.5 8700,1136.44 v1(8700,2779)
  Bottom Layer w10: v1(8700,2779) 9048.4,3127.4 12767.4,3127.4 13502,3862 14168,3862 DS1.2
NetDS1_3: DS1.3 U1.2 U1.3 U5.16 U?.16 | length 7623.4
  Top Layer w10: U5.16 13584,4410.81 13584,4480 13635,4531 14120,4531 14161,4490 14161,4278 14315,4124 DS1.3 ; v1(14561,4061) DS1.3 ; U1.2 U1.3 14935,3195 DS1.3
  Bottom Layer w10: U?.16 14520,4580 14561,4539 v1(14561,4061)
NetDS1_4: DS1.4 R9.1 | length 7661.3
  Top Layer w10: v1(8499,719) 8499,530 8510,519 8604,519 8608.96,523.96 R9.1
  Bottom Layer w10: v1(8499,719) 8592,812 8592,1018 9197,1623 11332,1623 11831,2122 12752,2122 14410,3780 14415,3780 DS1.4
NetDS1_6: DS1.6 R10.1 | length 9963.1
  Top Layer w10: R10.1 8821.56,440 9090,440 9143,493 9143,683 9123,703 9123,3460 9337,3674 9337,4555 9465,4683 14247,4683 DS1.6
NetDS1_7: DS1.7 R11.1 | length 8953.2
  Top Layer w10: R11.1 9212,535.96 9212,692 9555,1035 v1(9555,1150) ; v1(9447,1258) 9447,3625 9497,3675 9497,3860 9616,3979 v1(9616,4335)
  Bottom Layer w10: v1(9447,1258) v1(9555,1150) ; v1(9616,4335) 10647,4335 10773,4461 14369,4461 DS1.7
NetDS1_9: DS1.9 R6.1 | length 9639.5
  Top Layer w10: v1(8055,3653) 8055,1249 R6.1
  Bottom Layer w10: v1(8055,3653) 8537.47,4135.47 10300,4135.47 10400,4235.47 10640.54,4235.47 10816.07,4411 13955,4411 13997,4369 14169,4369 DS1.9
NetDS1_10: DS1.10 R5.1 | length 10153.9
  Top Layer w10: R5.1 8175.03,447.97 8358,265 13965,265 14020,320 14020,4320 DS1.10
NetLED1_1: LED1.1 P2.1 R13.1 R14.1 U5.8 U16.1 U?.8 | length 12915.2
  Top Layer w10: R13.1 8580,557.07 v1(8646.47,623.53) 8650.75,627.82 8974.95,627.82 9045.71,557.07 R14.1 ; U?.8 10276.01,3193.94 10227,3144.92 10227,2663 10255,2635 U16.1 10255,2024.21 P2.1 ; v1(13245,4060.81) U5.8
  Bottom Layer w10: v1(8646.47,623.53) 8850,420 8960,420 9229,689 11590.21,689 P2.1 ; U?.8 10342.26,3880 10387.26,3925 10621,3925 13253.99,3924 13269.18,3939.19 13366.61,3939.19 ; v1(13245,4060.81) 13366.61,3939.19 ; LED1.1 14561,3426 14561,3883 14504.81,3939.19 13366.61,3939.19
NetLED1_2: LED1.2 R4.1 | length 10320.3
  Top Layer w10: v1(7944,3466) 7944,1152.86 7935,1143.86 7935,538.96 R4.1
  Bottom Layer w10: v1(7944,3466) 8193,3715 8625,3715 8648.64,3691.36 9233.36,3691.36 9337,3795 13185,3795 13298.19,3908.19 14428.81,3908.19 14461,3876 14461,3426 LED1.2
NetP1_2: P1.2 U8.3 | length 6169.3
  Top Layer w10: U8.3 9540,4281.57 9576,4317.57 9576,4402 9599,4425 10467,4425 10557,4335 10681,4335 10815,4201 10815,2457 11699,1573 11699,590 11689,580 11084.21,580 P1.2
NetP2_2: P2.2 Q2.1 U10.13 U12.7 U16.4 VR2.3 | length 10978.4
  Top Layer w10: U12.7 9820,3615 v1(9873,3562) ; v1(10201,4225) 10600,4225 10621,4204 v1(10621,3542) ; U16.4 10405,2635 10761,2991 v1(10761,3522) ; Q2.1 12645,2097.4 VR2.3
  Bottom Layer w10: U10.13 10146,4280 v1(10201,4225) ; v1(9873,3562) 10721,3562 10721,3542 ; v1(10621,3542) 10721,3542 ; P2.2 12186.21,629.21 12876.82,1319.82 13055.18,1319.82 13160,1215 13422.6,1215 VR2.3 ; Q2.1 12577,3433 10850,3433 v1(10761,3522) 10741,3542 10721,3542
NetQ1_2: Q1.2 U7.3 | length 3904.5
  Top Layer w10: v1(9768,3087) 9873.2,3192.2 U7.3
  Bottom Layer w10: v1(9768,3087) 10172,3087 10197,3062 12799,3062 13167,3430 13200,3430 13255,3375 Q1.2
NetQ1_3: Q1.3 R2.1 U5.15 | length 8821.9
  Top Layer w10: R2.1 8794.75,579.32 8713,579.32 8713,482.08 8775.08,420 9107,420 9163,476 v1(9163,2674) ; Q1.3 13688,3733 13688,4340 13667.19,4360.81 U5.15
  Bottom Layer w10: v1(9163,2674) 12945,2674 13305,3034 Q1.3
NetQ2_2: Q2.2 U6.2 U8.5 | length 6369.8
  Top Layer w10: v1(9357,3637) 9376.31,3656.31 9376.31,3826.31 9553,4003 9553,4163.57 9535,4181.57 U8.5 ; v1(10875,3473) 10840,3438 10840,3111.18 10850,3101.18 U6.2
  Bottom Layer w10: v1(9357,3637) 10051,3637 10103,3585 12554,3585 12666,3473 ; v1(10875,3473) 12666,3473 ; Q2.2 12695,3444 12666,3473
NetQ2_3: Q2.3 R1.2 R2.2 R12.1 U1.1 U5.10 U7.8 | length 12439.1
  Top Layer w10: R2.2 8881.6,543.4 8825,600 8703,600 8693,590 ; R1.2 8994.12,553.7 8940,607.82 8710,607.82 8693,590.82 8693,590 ; R12.1 9560,534.79 ; 10151,3243.39 U7.8 10018.39,3243.39 9995,3220 9995,1080 ; Q2.3 v1(13510,2600) ; v1(13322,3782) 13473,3933 13473,4063.81 13520,4110.81 U5.10 ; 8693,590 8693,440 8759,374 9200,374 9255,429 9255,681 9302,728 ; 9302,728 9614,1040 9955,1040 9995,1080 ; 9302,728 9524,728 9572,680 9572,546.79 9560,534.79 ; 9560,534.79 9560.79,534.79 9995,969 9995,1080
  Bottom Layer w10: 10151,3243.39 10213.61,3306 12720,3306 12745,3331 Q2.3 12905,3365 v1(13322,3782) ; v1(13510,2600) U1.1
NetQ3_1: Q3.1 VR1.3 | length 4681.5
  Top Layer w10: v1(12120,1423) Q3.1
  Bottom Layer w10: v1(12120,1423) 14639.4,1423 VR1.3
NetQ3_2: Q3.2 U10.14 | length 4686.4
  Top Layer w10: v1(8858,3616) 8858,4435 8948,4525 9080,4525 9105,4500 9105,4425 U10.14
  Bottom Layer w10: v1(8858,3616) 8977,3497 10714,3497 10798,3413 12170,3403 Q3.2
NetQ3_3: Q3.3 R4.2 | length 7157.2
  Top Layer w10: R4.2 8015,557.46 v1(8015,3351)
  Bottom Layer w10: v1(8015,3351) 8102,3438 10736,3438 10845,3329 12210,3329 12220,3339 Q3.3
NetR3_1: R3.1 R12.2 U7.7 | length 3429.3
  Top Layer w10: R3.1 9390.6,561.4 9438,514 ; R12.2 9465.68,641.09 9438,613.4 9438,514 ; U7.7 10050.8,3217.8 10015,3182 10015,908 9591,484 9460,484 9438,506 9438,514
NetR5_2: R5.2 U?.14 | length 5960.7
  Top Layer w10: R5.2 8206.52,1765.52 8318,1877 8318,3175 8309,3184 8309,3336 8589.67,3616.67 8589.67,4234.67 v1(8665,4310)
  Bottom Layer w10: v1(8665,4310) 8685,4330 8920,4330 9015,4425 10316,4425 10361,4380 U?.14
NetR6_2: R6.2 U?.15 | length 6687.5
  Top Layer w10: v1(7904,4124) 7904,520 7933,491 8080,491 8094.01,505.01 R6.2
  Bottom Layer w10: v1(7904,4124) 8305,4525 10531.01,4525 U?.15
NetR7_2: R7.2 U?.9 | length 5614.4
  Top Layer w10: R7.2 8319.04,1761.04 8680,2122 8680,2583 8349,2914 8349,3182 8329,3202 8329,3273 8665,3609 v1(8665,3732)
  Bottom Layer w10: v1(8665,3732) 8748,3815 10511.01,3815 U?.9
NetR8_2: R8.2 U?.10 | length 5901.4
  Top Layer w10: R8.2 8431.55,769 8807,1144.45 8807,2543 9015.47,2751.47 9015.47,3900.47 9040,3925 9070,3925 9105,3960 9105,4100 9080,4125 9024,4125 8898.47,3999.47 v1(8898.47,3935.47)
  Bottom Layer w10: v1(8898.47,3935.47) 10367,3935.47 10411.53,3980 U?.10
NetR9_2: R9.2 U?.11 | length 5513.5
  Top Layer w10: R9.2 8656.58,412.42 8718,351 9919,351 10197,629 10197,3154.92 10233.61,3191.54 10233.61,3344.23 10214,3363.85 10214,3883 10256,3925 10421.01,3925 U?.11
NetR10_2: R10.2 U?.12 | length 4876.3
  Top Layer w10: R10.2 8752.54,555.46 8828,480 v1(8917,480) ; v1(9760,1083) 9760,3015 9728,3047 9728,3110 10157,3539 10157,3951 10231,4025 10421.01,4025 U?.12
  Bottom Layer w10: v1(8917,480) 9520,1083 v1(9760,1083)
NetR11_2: R11.2 U?.13 | length 4681.5
  Top Layer w10: R11.2 9187.65,791.65 9515,1119 9515,3653 9517,3655 9517,3810 10031.53,4324.53 10531.49,4324.53 U?.13
NetR13_2: R13.2 SW2.3 U15.2 | length 6746
  Top Layer w10: R13.2 8544.24,766.01 v1(8712.23,934) ; 11762.2,1844.2 U15.2
  Bottom Layer w10: v1(8712.23,934) 9297.23,1519 11437,1519 11762.2,1844.2 12001,2083 13913,2083 SW2.3
NetR14_2: R14.2 SW1.3 U15.1 | length 6264.5
  Top Layer w10: v1(9032,1344) 9032,669.27 9080,621.27 R14.2 ; v1(11693,1842) 11736.61,1885.61 U15.1 11736.61,1945.61 11760,1969 11806,1969 11837,2000 11837,3049 11815,3071 11815,4306.97 SW1.3
  Bottom Layer w10: v1(9032,1344) 9259,1571 11422,1571 v1(11693,1842)
NetSW1_1: SW1.1 SW2.1 U10.9 U10.16 U13.2 U15.8 U16.2 VR1.1 VR2.1 | length 14174.6
  Top Layer w10: v1(9060,2466) v1(9060,2515) U10.9 9125,3945 9125,4515 U10.16 ; v1(9319,2466) 9319,2979 9360,3020 U13.2 ; v1(10305,2434) U16.2 ; v1(11425,2302) 11683,2044 11736.61,2044 U15.8 11736.61,2016 11653,1932.39 11653,1800 11693,1760 11737,1760 11857,1880 ; SW1.1 11862.44,4054 11857,4048.56 11857,1880 ; VR2.1 12126.6,1267.4 11857,1537 11857,1880 ; VR1.1 14355,1327.4 SW2.1
  Bottom Layer w10: v1(9060,2466) 9109,2466 ; v1(9319,2466) 9109,2466 ; v1(10305,2434) 10224,2515 v1(9060,2515) 9109,2466 ; v1(11425,2302) 9273,2302 9109,2466 ; VR2.1 13075.4,1167 14194.6,1167 VR1.1
NetU2_1: U2.1 U8.6 | length 4504.7
  Top Layer w10: U8.6 9473,4131.57 9473,4609 9520,4656 11117,4656 11474,4299 11474,2859.46 11636.46,2697 U2.1
NetU2_2: U2.2 U4.1 U9.3 | length 6509.8
  Top Layer w10: v1(8369,3244) 8369,3068.87 8380,3057.87 U9.3 ; v1(11515,3176) 11795,2896 ; U2.2 11662.05,2593.05 11814,2745 11814,2877 11795,2896 ; U4.1 12402,4381.57 12343.57,4440 11835,4440 11795,4400 11795,2896
  Bottom Layer w10: v1(8369,3244) 10063,3244 10131,3176 v1(11515,3176)
NetU2_3: U2.3 U3.1 | length 2348
  Top Layer w10: U3.1 11160,4389.65 11227,4322.65 11227,2839 11566,2500 11677.64,2500 11687.64,2510 U2.3
NetU3_2: U3.2 U6.3 | length 1427.3
  Top Layer w10: U6.3 10955,3075.59 11077,3197.59 11077,4339.65 U3.2
NetU3_3: U3.3 U8.2 | length 1737.1
  Top Layer w10: U8.2 9527,4331.57 9556,4360.57 9556,4428.73 9651.8,4524.53 10700.47,4524.53 10935.35,4289.65 U3.3
NetU4_2: U4.2 U6.1 | length 2905.5
  Top Layer w10: U6.1 10925.77,3126.77 10959,3160 v1(10959,3517) ; U4.2 12573.43,4331.57 12585,4320 12585,3537 v1(12565,3517)
  Bottom Layer w10: v1(10959,3517) v1(12565,3517)
NetU5_2: U5.2 U?.6 | length 4403.4
  Top Layer w10: v1(10117,3653) 10117,4019 10178,4080 U?.6 ; v1(13128,3685) 13128,4259.81 13229,4360.81 U5.2
  Bottom Layer w10: v1(10117,3653) 10157,3613 13056,3613 v1(13128,3685)
NetU5_6: U5.6 U?.7 | length 3139.2
  Top Layer w10: v1(13234.19,4160.81) U5.6
  Bottom Layer w10: U?.7 10326.01,4030 10880,4030 11051,4201 13194,4201 v1(13234.19,4160.81)
NetU5_7: U5.7 U13.1 | length 4939.5
  Top Layer w10: U13.1 9397,3070 9397,3658 v1(9434,3695) ; U5.7 13360,4110.81 13380,4090.81 13380,4048.81 13329,3997.81 v1(13329,3867)
  Bottom Layer w10: v1(9434,3695) 9434,3706 9480,3752 13214,3752 v1(13329,3867)
NetU5_11: U5.11 U?.1 | length 6292.9
  Top Layer w10: U5.11 13625.19,4160.81 13646,4140 v1(13646,4009)
  Bottom Layer w10: U?.1 10472.01,4776 14560,4776 14601,4735 14601,4030 14580,4009 v1(13646,4009)
NetU5_14: U5.14 U?.2 | length 5198.7
  Top Layer w10: U5.14 v1(13648,4310.81)
  Bottom Layer w10: U?.2 10310.54,4480 10355.07,4435.47 10621,4435.47 10667.53,4482 14419,4482 14461,4440 14461,4391 14380.81,4310.81 v1(13648,4310.81)
NetU7_2: U7.2 U7.6 | length 415.5
  Top Layer w10: U7.2 9969,3217.8 9969,3240 10015,3286 10148,3286 10174,3260 10174,3230.23 10135.98,3192.2 U7.6
NetU9_1: U9.1 U10.10 U14.3 | length 2693.4
  Top Layer w10: U14.3 7987,4270 7977,4280 7977,4390 7987,4400 8665,4400 8705,4360 v1(8705,4030) 8705,3332 8482.06,3109.06 U9.1
  Bottom Layer w10: v1(8705,4030) 9010,4030 U10.10
NetU9_2: U9.2 U10.11 | length 1348.3
  Top Layer w10: U9.2 8558.94,3083.46 8995.47,3520 8995.47,4015.47 U10.11
NetU10_12: U10.12 U10.15 | length 336.9
  Top Layer w10: U10.12 9015.47,4224.53 9015.47,4435.47 U10.15
NetU12_2: U12.2 U12.3 VR1.2 VR2.2 | length 7587.1
  Top Layer w10: U12.2 U12.3 9590,3565 9708,3447 9708,1154 v1(9720,1142)
  Bottom Layer w10: v1(9720,1142) 12438,1142 12637,1341 13151.4,1341 VR2.2 13356.6,1399 14413.4,1399 VR1.2
NetU12_6: U12.6 U14.1 | length 2387.9
  Top Layer w10: U14.1 8109,4370 8159,4320 8159,4063 8312,3910 v1(8312,3668) ; v1(9654,3565) U12.6
  Bottom Layer w10: v1(8312,3668) 9246,3668 9349,3565 v1(9654,3565)
NetU14_2: U14.2 U15.7 | length 5865.8
  Top Layer w10: U14.2 8080,4320 8120,4280 8120,4008.57 8272,3856.57 v1(8272,2160) ; v1(11740,2116) 11762.2,2093.8 U15.7
  Bottom Layer w10: v1(8272,2160) 8316,2116 v1(11740,2116)
pads on no net: DS1.5 DS1.8 P1.1 U2.4 U2.5 U2.6 U2.7 U2.8 U2.9 U2.10 U2.11 U2.12 U2.13 U2.14 U3.4 U3.5 U3.6 U3.7 U3.8 U3.9 U3.10 U3.11 U3.12 U3.13 U3.14 U4.3 U4.4 U4.5 U4.6 U4.7 U4.8 U4.9 U4.10 U4.11 U4.12 U4.13 U4.14 U5.1 U5.9 U6.4 U6.5 U6.6 U6.7 U6.8 U6.9 U6.10 U6.11 U6.12 U6.13 U6.14 U7.4 U8.1 U8.4 U8.7 U8.8 U8.9 U8.10 U8.11 U8.12 U8.13 U8.14 U9.4 U9.5 U9.6 U9.7 U9.8 U9.9 U9.10 U9.11 U9.12 U9.13 U9.14 U10.1 U10.2 U10.3 U10.4 U10.5 U10.6 U10.7 U10.8 U12.1 U12.4 U12.5 U12.8 U13.3 U13.4 U13.5 U13.6 U13.7 U13.8 U13.9 U13.10 U13.11 U13.12 U13.13 U13.14 U14.4 U14.5 U14.6 U14.7 U14.8 U14.9 U14.10 U14.11 U14.12 U14.13 U14.14 U15.3 U15.4 U15.5 U15.6 U16.3 U16.5 U16.6 U16.7 U16.8 U?.3 U?.4 U?.5

## Text inside footprints (layer, text, board x,y; h text height)
LED1: Top Overlay "K" at 14500,3280 h30; Mechanical 15 "K" at 14500,3280 h30